# Altium PCB PCB1.PcbDoc
Units mil, origin at the board's own origin, x right, y up, seen from the top; angles counter-clockwise.
Board outline 6496.06 x 3740.16 mil, 2 copper layers (Top Layer, Bottom Layer); 28 components, 22 nets, 182 pads, 0 vias.
Unrouted connection lines stored in the file: 46.
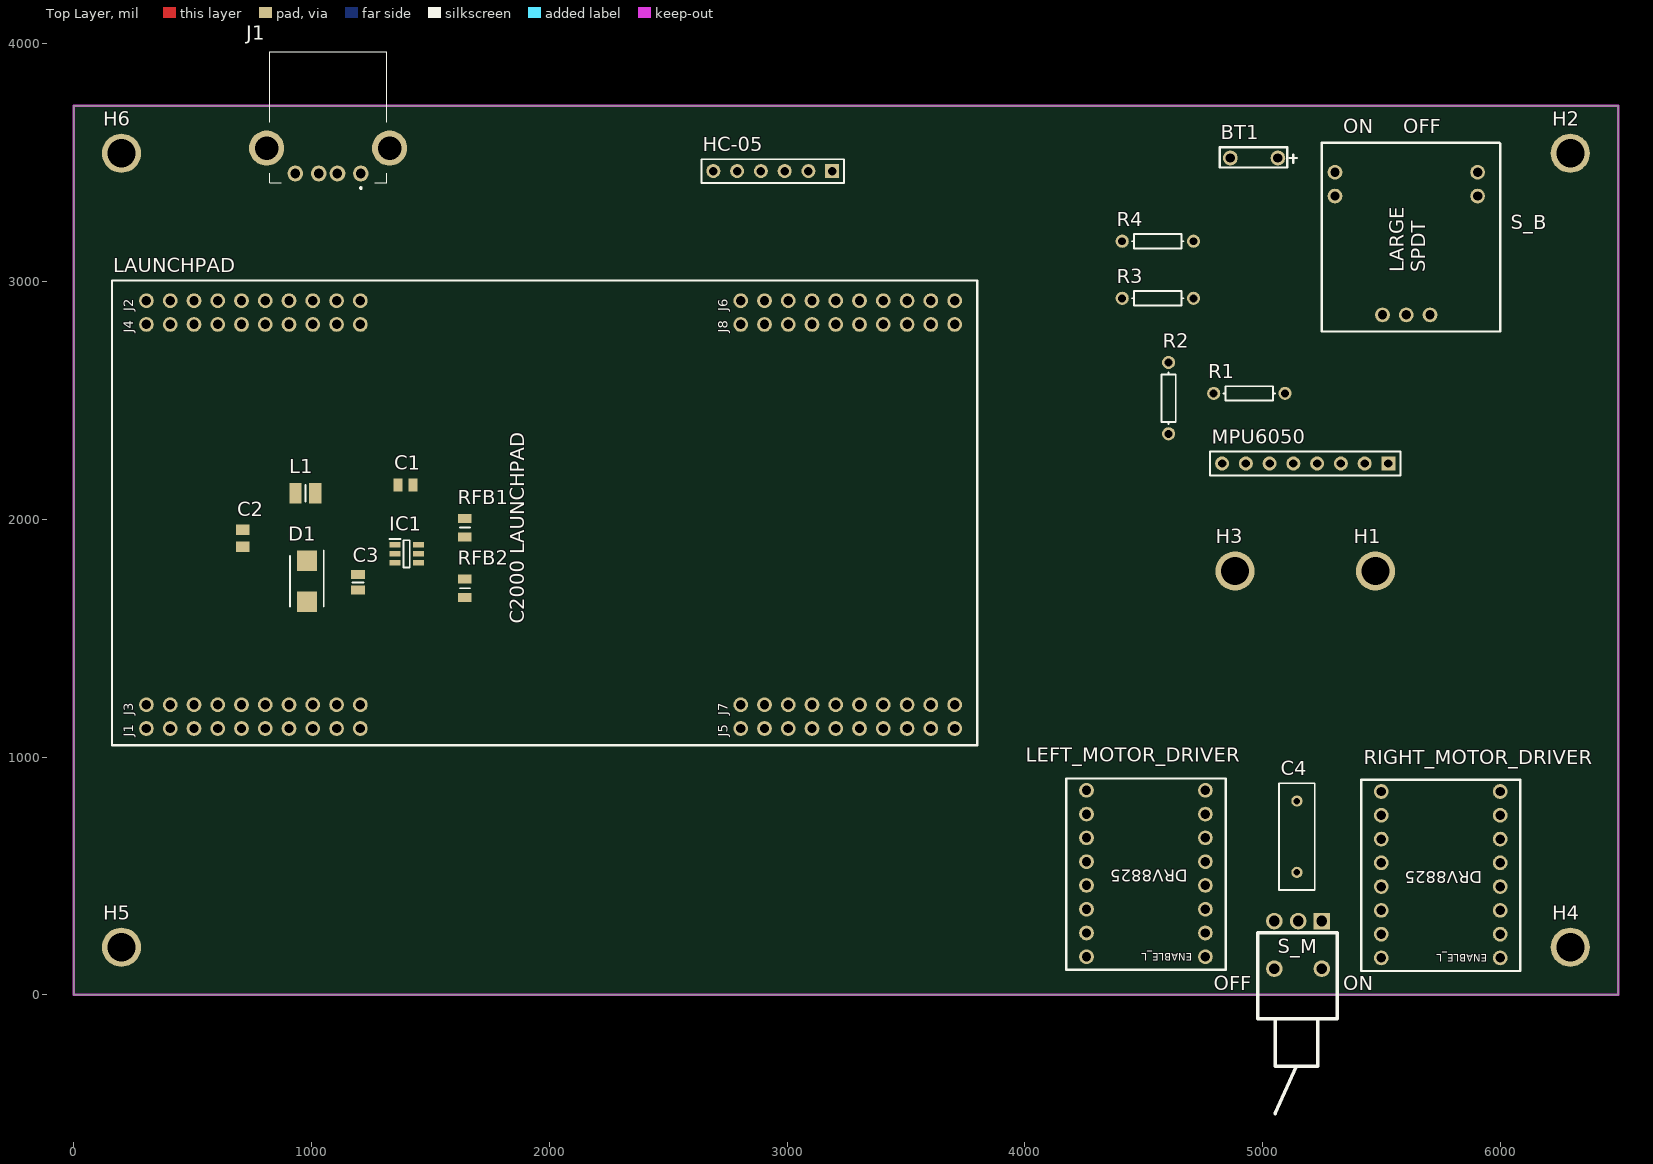
[diagram p0: Top Layer view]
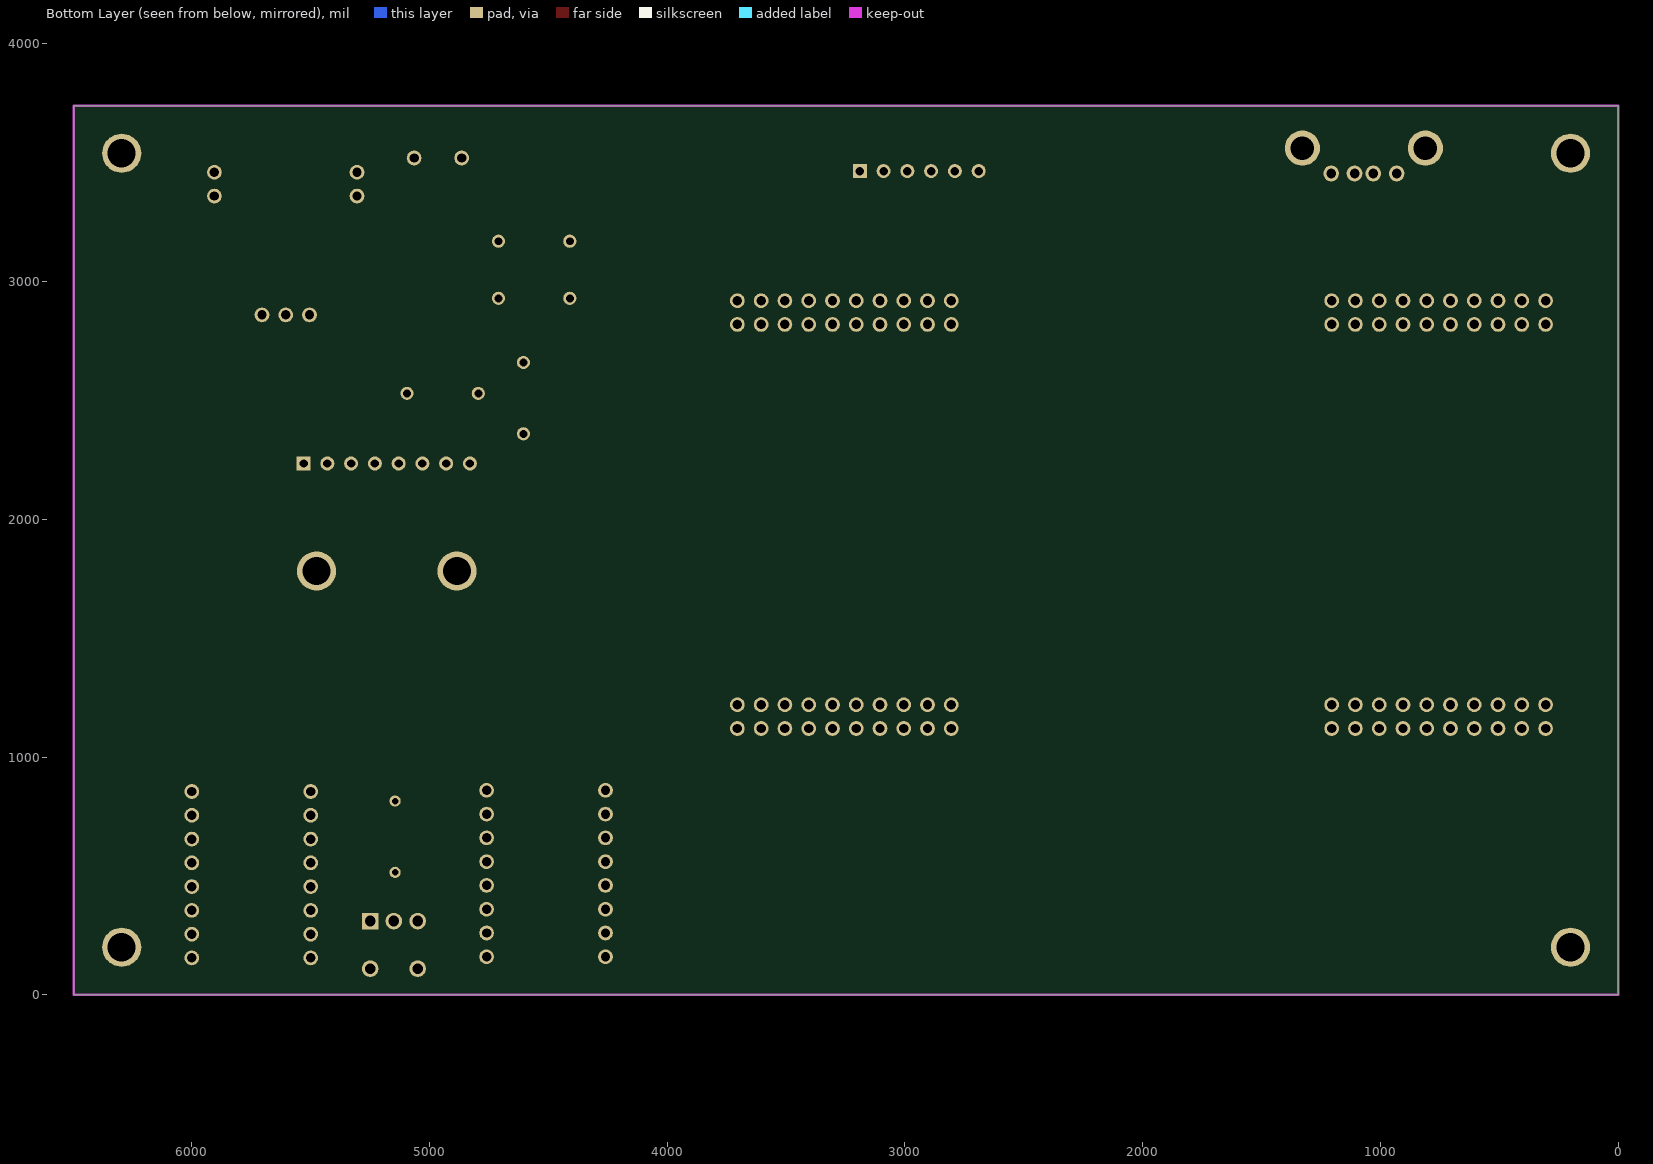
[diagram p1: Bottom Layer view, seen from below]

## Layer stack, top to bottom
Top Solder: solder mask 0.4, Solder Resist, Dk 3.5
Top Layer: signal copper 1.4
Dielectric 1: dielectric 12.6, FR-4, Dk 4.8
Bottom Layer: signal copper 1.4
Bottom Solder: solder mask 0.4, Solder Resist, Dk 3.5

## Board outline
0,0 6496.06,0 6496.06,3740.16 0,3740.16

## Design rules (kind name [scope] priority, off if disabled: settings)
Clearance [All] p1: gap=10 ignorepadtopadclearanceinfootprint=FALSE except(0: Arc-Hole Track-Hole SMDPad-Hole THPad-Hole Via-Hole Fill-Hole Poly-Hole Region-Hole Text-Hole)
PolygonConnect [All] p1: connectstyle=Relief reliefconductorwidth=10 reliefentries=4 polygonreliefangle="90 Angle" airgapwidth=10
RoutingVias [All] p1: holewidth=28 width=50 viastyle="Through Hole" minholewidth=28 minwidth=50 maxholewidth=28 maxwidth=50
SolderMaskExpansion [All] p1: expansion=4 istentingtop=FALSE
Width [All] p1: maxlimit=20 minlimit=20 preferedwidth=20
30 further rules are at their usual default settings.

## Components (designator, comment, footprint, x,y, rotation, side; value= is the part's Value field where it differs from the comment)
BT1 "Battery" BATT_FP 5065,3520 r180 top
C1 "22nF" CAPC2012X135N 1395,2145 r0 top
C2 "22uF" CAPC2012X140N 710,1921 r90 top
C3 "10uF" CAPC2114X145N 1195,1735 r90 top
C4 "Cap" RAD-0.3 5145,665 r90 top value=47uF
D1 "SSB44-E3_52T" DIOM5436X244N 980,1740 r270 top
H1 "Hole 3mm" "Hole 3mm"#1 5470,1675 r0 top
H2 "Hole 3mm" "Hole 3mm"#2 6295,3540 r0 top
H3 "Hole 3mm" "Hole 3mm"#3 4880,1782.24 r0 top
H4 "Hole 3mm" "Hole 3mm"#2 6295,200 r0 top
H5 "Hole 3mm" "Hole 3mm"#2 200,200 r0 top
H6 "Hole 3mm" "Hole 3mm"#2 200,3540 r0 top
HC-05 "Header 6" HDR1X6 3190,3465 r180 top
IC1 "ACT4088US-T" SOT95P280X145-6N 1400,1855 r0 top
J1 "SS-52100-001" SS52100001 1207.17,3455 r180 top
L1 "4.7uH" INDC2520X120N 973.66,2110 r0 top
LAUNCHPAD "LAUNCHXL_F28379D" LAUNCH_PAD 305,1120 r90 top
LEFT_MOTOR_DRIVER "DRV8825" DRV8825_FP 4760,160 r180 top
MPU6050 "Header 8" HDR1X8 5530,2235 r180 top
R1 "Res1" AXIAL-0.3 4945,2530 r0 top value=1K
R2 "Res1" AXIAL-0.3 4605,2510 r270 top value=1K
R3 "Res1" AXIAL-0.3 4560,2930 r0 top value=1K
R4 "Res1" AXIAL-0.3 4560,3170 r180 top value=1K
RFB1 "49.9K" RESC2012X50N 1645,1965 r90 top
RFB2 "9.53K" RESC2012X50N 1645,1710 r90 top
RIGHT_MOTOR_DRIVER "DRV8825" DRV8825_FP 6000,155 r180 top
S_B "SW-SPDT" SPDT_LARGE 5505,2860 r90 top
S_M "SW-SPDT" "SW DPST jameco" 5152.36,311.89 r0 top

## Footprints (in the part's own frame and the unit in brackets; to place one, negate y for a bottom-side part, rotate by r counter-clockwise, add the part's x,y. Pads: shape width x height; smd on the part's side, far side on the other; paste and mask are expansions set on the pad)
AXIAL-0.3 [mm] "Axial Device, Thru-Hole; 2 Leads; 0.3 in Pin Spacing"
  round 1.4 hole 0.85: 1(-3.81,0) 2(3.81,0)
  silkscreen extent -2.77,-0.76 2.77,0.76
BATT_FP [mil]
  round 62 hole 39.4: 1(0,0) 2(200,0)
  silkscreen extent -80,-45 245,40
CAPC2012X135N [mm]
  rect 0.96x1.39 smd: 1(-0.81,0) 2(0.81,0)
  body extent -1,-0.63 1,0.63, height 1.35
CAPC2012X140N [mil]
  rect 44x57 smd: 1(-36,0) 2(36,0)
CAPC2114X145N [mm]
  rect 0.96x1.49 smd: 1(-0.84,0) 2(0.84,0)
  silkscreen extent 0,-0.58 0,0.58, body extent -1.05,-0.67 1.05,0.67, height 1.45
DIOM5436X244N [mm]
  rect 2.2x2.15 smd: 1(-2.2,0) 2(2.2,0)
  silkscreen extent -3.28,-1.81 2.7,1.81, body extent -2.7,-1.81 2.7,1.81, height 2.44
DRV8825_FP [mil]
  round 62 hole 39.4: 1(0,0) 2(0,-100) 3(0,-200) 4(0,-300) 5(0,-400) 6(0,-500) 7(0,-600) 8(0,-700) 9(500,0) 10(500,-100) 11(500,-200) 12(500,-300) 13(500,-400) 14(500,-500) 15(500,-600) 16(500,-700)
  silkscreen extent -85,-750 585,55
HDR1X6 [mm] "Connector; Header; 6 Position"
  rect 1.5x1.5 hole 0.9: 1(0,0)
  round 1.5 hole 0.9: 2(2.54,0) 3(5.08,0) 4(7.62,0) 5(10.16,0) 6(12.7,0)
  silkscreen extent -1.27,-1.27 13.97,1.27
HDR1X8 [mm] "Connector; Header; 8 Position"
  rect 1.5x1.5 hole 0.9: 1(0,0)
  round 1.5 hole 0.9: 2(2.54,0) 3(5.08,0) 4(7.62,0) 5(10.16,0) 6(12.7,0) 7(15.24,0) 8(17.78,0)
  silkscreen extent -1.27,-1.27 19.05,1.27
"Hole 3mm"#1 [mil]
  round 165 hole 118.11: 1(5.28,107.24)
"Hole 3mm"#2 [mil]
  round 165 hole 118.11: 1(0,0)
"Hole 3mm"#3 [mil]
  round 165 hole 118.11: 1(4.72,0)
INDC2520X120N [mm]
  rect 1.3x2.2 smd: 1(-1.05,0) 2(1.05,0)
  silkscreen extent 0,-0.9 0,0.9, body extent -1.25,-1 1.25,1, height 1.2
LAUNCH_PAD [mil]
  round 62 hole 39.4: 1(0,0) 2(0,-100) 3(0,-200) 4(0,-300) 5(0,-400) 6(0,-500) 7(0,-600) 8(0,-700) 9(0,-800) 10(0,-900) 11(1800,-900) 12(1800,-800) 13(1800,-700) 14(1800,-600) 15(1800,-500) 16(1800,-400) 17(1800,-300) 18(1800,-200) 19(1800,-100) 20(1800,0) 21(100,0) 22(100,-100) 23(100,-200) 24(100,-300) 25(100,-400) 26(100,-500) 27(100,-600) 28(100,-700) 29(100,-800) 30(100,-900) 31(1700,-900) 32(1700,-800) 33(1700,-700) 34(1700,-600) 35(1700,-500) 36(1700,-400) 37(1700,-300) 38(1700,-200) 39(1700,-100) 40(1700,0) 41(0,-2500) 42(0,-2600) 43(0,-2700) 44(0,-2800) 45(0,-2900) 46(0,-3000) 47(0,-3100) 48(0,-3200) 49(0,-3300) 50(0,-3400) 51(1800,-3400) 52(1800,-3300) 53(1800,-3200) 54(1800,-3100) 55(1800,-3000) 56(1800,-2900) 57(1800,-2800) 58(1800,-2700) 59(1800,-2600) 60(1800,-2500) 61(100,-2500) 62(100,-2600) 63(100,-2700) 64(100,-2800) 65(100,-2900) 66(100,-3000) 67(100,-3100) 68(100,-3200) 69(100,-3300) 70(100,-3400) 71(1700,-3400) 72(1700,-3300) 73(1700,-3200) 74(1700,-3100) 75(1700,-3000) 76(1700,-2900) 77(1700,-2800) 78(1700,-2700) 79(1700,-2600) 80(1700,-2500)
  silkscreen extent -70,-3495 1885,145
RAD-0.3 [mm] "Radial Cap, Thru-Hole; 2 Leads; 0.3 in Pin Spacing"
  round 1.2 hole 0.7: 1(-3.81,0) 2(3.81,0)
  silkscreen extent -5.71,-1.91 5.71,1.91
RESC2012X50N [mm]
  rect 0.95x1.45 smd: 1(-1,0) 2(1,0)
  silkscreen extent 0,-0.53 0,0.53, body extent -1.02,-0.63 1.02,0.63, height 0.5
SOT95P280X145-6N [mm]
  rect 1.15x0.6 smd: 1(-1.25,0.95) 2(-1.25,0) 3(-1.25,-0.95) 4(1.25,-0.95) 5(1.25,0) 6(1.25,0.95)
  silkscreen extent -1.82,-1.45 0.33,1.6, body extent -1.4,-1.45 1.4,1.45, height 1.45
SPDT_LARGE [mil]
  round 62 hole 39.4: 1(0,0) 2(0,-100) 3(0,-200) 4(500,200) 5(600,200) 6(500,-400) 7(600,-400)
  silkscreen extent -70,-495 725,255
SS52100001 [mm]
  round 1.68 hole 1.02: 1(0,0) 2(2.5,0) 3(4.5,0) 4(7,0)
  round 3.75 hole 2.5: MH1(-3.07,-2.71) MH2(10.07,-2.71)
  silkscreen extent -2.75,-12.99 9.75,1.66, body extent -4.21,-12.99 11.22,1.01, height 8
"SW DPST jameco" [mil]
  rect 70x70 hole 45: 1(97.64,-1.89)
  round 70 hole 45: 2(-2.36,-1.89) 3(-102.36,-1.89) 4(-102.36,-201.89) 5(97.64,-201.89)
  silkscreen extent -172,-812 162,-52

## Part data
BT1: "Multicell Battery", LatestRevisionDate=17-Jul-2002, LatestRevisionNote="Re-released for DXP Platform.", PackageDescription="Battery; 2 Leads", PackageReference=BAT-2, Published=24-Mar-1999, Publisher="Altium Limited"
C1: library part VJ0805Y223JXAPW1BC, "Capacitor", Manufacturer_Name=Vishay, Datasheet Link=https://componentsearchengine.com/Datasheets/1/VJ0805Y223JXAPW1BC.pdf, Height=1.35mm, Manufacturer_Part_Number=VJ0805Y223JXAPW1BC
C2: library part 08056D226MAT2A, "Capacitor", Manufacturer_Name=AVX, Datasheet Link=http://componentsearchengine.com/Datasheets/3/08056D226MAT2A.pdf, Manufacturer_Part_Number=08056D226MAT2A
C3: library part TMK212BC6106KG-T, "Capacitor", Manufacturer_Name="TAIYO YUDEN", Datasheet Link=https://ds.yuden.co.jp/TYCOMPAS/ut/download?pn=LMK063BBJ474MPLF&fileType=CA, Height=1.45mm, Manufacturer_Part_Number=TMK212BC6106KG-T
C4: "Capacitor", LatestRevisionDate=17-Jul-2002, LatestRevisionNote="Re-released for DXP Platform.", PackageDescription="Radial Cap, Thru-Hole; 2 Leads; 0.3 in Pin Spacing", PackageReference=RAD-0.3, Published=8-Jun-2000, Publisher="Altium Limited"
D1: "Schottky Diode", Manufacturer_Name=Vishay, Manufacturer_Part_Number=SSB44-E3/52T, Mouser2 Part Number=625-SSB44-E3, Datasheet Link=https://componentsearchengine.com//SSB44-E3_52T.pdf, Height=2.44mm, Mouser2 Price/Stock=https://www.mouser.com/Search/Refine.aspx?Keyword=625-SSB44-E3
HC-05: "Header, 6-Pin", LatestRevisionDate=17-Jul-2002, LatestRevisionNote="Re-released for DXP Platform.", Publisher="Altium Limited"
IC1: "Integrated Circuit", Manufacturer_Name=Qorvo, Mouser Part Number=107-ACT4088US-T, Datasheet Link=https://active-semi.com/wp-content/uploads/ACT4088_Datasheet.pdf, Height=1.45mm, Manufacturer_Part_Number=ACT4088US-T, Mouser Price/Stock=https://www.mouser.co.uk/ProductDetail/Qorvo/ACT4088US-T?qs=QQJxVsr8EGZznLQLhk8tEQ%3D%3D
J1: "Connector", Manufacturer_Name=Bel, Height=7.9mm, Manufacturer_Part_Number=SS-52100-001
L1: library part TFM252012ALVA4R7MTAA, "Inductor", Manufacturer_Name=TDK, Datasheet Link=https://www.mouser.hk/datasheet/2/400/TDK_02062019_TFM-ALVA_datasheet-1530462.pdf, Height=1.2mm, Manufacturer_Part_Number=TFM252012ALVA4R7MTAA
MPU6050: "Header, 8-Pin", LatestRevisionDate=17-Jul-2002, LatestRevisionNote="Re-released for DXP Platform.", Publisher="Altium Limited"
R1 R2 R3 R4: "Resistor", LatestRevisionDate=17-Jul-2002, LatestRevisionNote="Re-released for DXP Platform.", PackageDescription="Axial Device, Thru-Hole; 2 Leads; 0.3 in Pin Spacing", PackageReference=AXIAL-0.3, Published=8-Jun-2000, Publisher="Altium Limited"
RFB1: library part CRCW080549K9FKEA, "Resistor", Manufacturer_Name=Vishay, Datasheet Link=http://www.vishay.com/docs/20035/dcrcwe3.pdf, Height=0.5mm, Manufacturer_Part_Number=CRCW080549K9FKEA
RFB2: library part CRCW08059K53FKEA, "Resistor", Manufacturer_Name=Vishay, Mouser2 Part Number=71-CRCW0805-9.53K-E3, Datasheet Link=https://componentsearchengine.com//CRCW08059K53FKEA.pdf, Height=0.5mm, Manufacturer_Part_Number=CRCW08059K53FKEA, Mouser2 Price/Stock=https://www.mouser.com/Search/Refine.aspx?Keyword=71-CRCW0805-9.53K-E3
S_B S_M: "SPDT Subminiature Toggle Switch, Right Angle Mounting, Vertical Actuation", ComponentLink1Description="Manufacturer Link", ComponentLink1URL=http://www.apem.com, DatasheetVersion=05-Dec-2000, LatestRevisionDate=17-Dec-2003, LatestRevisionNote="Schematic revised, PCB Footprint replaced.", PackageDescription="Switch; 4 Leads", PackageReference=TL36WW15050, Published=24-Mar-1999, Publisher="Altium Limited"

## Nets (pads, with @x,y where several pads share a name; then routed paths per layer and width w, separated by ;. In a path a pad name is that pad's centre, name@x,y a point inside that pad or via, vN(x,y) a via of type N, cw(c..) or ccw(c..) an arc to the next point about the centre after c; other vN are vias at no path point)
3V3: HC-05.2 LAUNCHPAD.1 LAUNCHPAD.41 MPU6050.1 R1.2 R2.1
5V: LAUNCHPAD.21 LAUNCHPAD.61 LEFT_MOTOR_DRIVER.2 LEFT_MOTOR_DRIVER.3 LEFT_MOTOR_DRIVER.10 RIGHT_MOTOR_DRIVER.2 RIGHT_MOTOR_DRIVER.3 RIGHT_MOTOR_DRIVER.10 S_M.1
5V_USB: C2.2 J1.1 L1.1 RFB1.2
12V: C3.2 C4.2 IC1.2 LEFT_MOTOR_DRIVER.16 R3.2 RIGHT_MOTOR_DRIVER.16 S_B.3
BATT_LEVEL: LAUNCHPAD.70 R3.1 R4.2
GND: BT1.2 C2.1 C3.1 C4.1 D1.2 HC-05.3 IC1.5 J1.4 LAUNCHPAD.20 LAUNCHPAD.22 LAUNCHPAD.60 LAUNCHPAD.62 LEFT_MOTOR_DRIVER.9 LEFT_MOTOR_DRIVER.15 MPU6050.2 R4.1 RFB2.1 RIGHT_MOTOR_DRIVER.9 RIGHT_MOTOR_DRIVER.15
I2C_SCL: LAUNCHPAD.10 MPU6050.3 R1.1
I2C_SDA: LAUNCHPAD.9 MPU6050.4 R2.2
LEFT_DIR: LAUNCHPAD.42 LEFT_MOTOR_DRIVER.8
LEFT_STEP: LAUNCHPAD.43 LEFT_MOTOR_DRIVER.7
MOTOR_ENABLE: LAUNCHPAD.46 S_M.3
NetBT1_1: BT1.1 S_B.2
NetC1_1: C1.1 D1.1 IC1.1 L1.2
NetC1_2: C1.2 IC1.6
NetIC1_4: IC1.4 RFB1.1 RFB2.2
NetLEFT_MOTOR_DRIVER_1: LEFT_MOTOR_DRIVER.1 RIGHT_MOTOR_DRIVER.1 S_M.2
NetLEFT_MOTOR_DRIVER_5: LEFT_MOTOR_DRIVER.5 LEFT_MOTOR_DRIVER.6
NetRIGHT_MOTOR_DRIVER_5: RIGHT_MOTOR_DRIVER.5 RIGHT_MOTOR_DRIVER.6
RIGHT_DIR: LAUNCHPAD.48 RIGHT_MOTOR_DRIVER.8
RIGHT_STEP: LAUNCHPAD.45 RIGHT_MOTOR_DRIVER.7
SCIRXDA: HC-05.4 LAUNCHPAD.77
SCITXDA: HC-05.5 LAUNCHPAD.78
pads on no net: H1.1 H2.1 H3.1 H4.1 H5.1 H6.1 HC-05.1 HC-05.6 IC1.3 J1.2 J1.3 J1.MH1 J1.MH2 LAUNCHPAD.2 LAUNCHPAD.3 LAUNCHPAD.4 LAUNCHPAD.5 LAUNCHPAD.6 LAUNCHPAD.7 LAUNCHPAD.8 LAUNCHPAD.11 LAUNCHPAD.12 LAUNCHPAD.13 LAUNCHPAD.14 LAUNCHPAD.15 LAUNCHPAD.16 LAUNCHPAD.17 LAUNCHPAD.18 LAUNCHPAD.19 LAUNCHPAD.23 LAUNCHPAD.24 LAUNCHPAD.25 LAUNCHPAD.26 LAUNCHPAD.27 LAUNCHPAD.28 LAUNCHPAD.29 LAUNCHPAD.30 LAUNCHPAD.31 LAUNCHPAD.32 LAUNCHPAD.33 LAUNCHPAD.34 LAUNCHPAD.35 LAUNCHPAD.36 LAUNCHPAD.37 LAUNCHPAD.38 LAUNCHPAD.39 LAUNCHPAD.40 LAUNCHPAD.44 LAUNCHPAD.47 LAUNCHPAD.49 LAUNCHPAD.50 LAUNCHPAD.51 LAUNCHPAD.52 LAUNCHPAD.53 LAUNCHPAD.54 LAUNCHPAD.55 LAUNCHPAD.56 LAUNCHPAD.57 LAUNCHPAD.58 LAUNCHPAD.59 LAUNCHPAD.63 LAUNCHPAD.64 LAUNCHPAD.65 LAUNCHPAD.66 LAUNCHPAD.67 LAUNCHPAD.68 LAUNCHPAD.69 LAUNCHPAD.71 LAUNCHPAD.72 LAUNCHPAD.73 LAUNCHPAD.74 LAUNCHPAD.75 LAUNCHPAD.76 LAUNCHPAD.79 LAUNCHPAD.80 LEFT_MOTOR_DRIVER.4 LEFT_MOTOR_DRIVER.11 LEFT_MOTOR_DRIVER.12 LEFT_MOTOR_DRIVER.13 LEFT_MOTOR_DRIVER.14 MPU6050.5 MPU6050.6 MPU6050.7 MPU6050.8 RIGHT_MOTOR_DRIVER.4 RIGHT_MOTOR_DRIVER.11 RIGHT_MOTOR_DRIVER.12 RIGHT_MOTOR_DRIVER.13 RIGHT_MOTOR_DRIVER.14 S_B.1 S_B.4 S_B.5 S_B.6 S_B.7 S_M.4 S_M.5

## Polygon pours and split planes (outlines as drawn)
GND on Bottom Layer "NONET_L02_P004" (hatched 45Degree grid 20 track 8, shelved, pour order 4): 0,0 0,3740.16 6496.06,3740.16 6496.06,0
GND on Bottom Layer "NONET_L02_P002" (hatched 45Degree grid 20 track 8, shelved, pour order 2): 0,0
GND on Bottom Layer "NONET_L02_P001" (hatched 45Degree grid 20 track 8, shelved, pour order 1): 6496,0
12V on Top Layer "NONET_L01_P005" (hatched 45Degree grid 20 track 8, shelved, pour order 5): 0,0 0,3740.16 6496.06,3740.16 6496.06,0

## Keep-outs
Keep-Out Layer:
  the board outline again, w10

## Silkscreen, mask and mechanical layers (free items; w line width, h text height)
Top Overlay:
  text "ON     OFF" at 5340,3625 h60
  text "OFF" at 4795,20 h60
  text "ON" at 5340,20 h60

## Text inside footprints (layer, text, board x,y; h text height)
LAUNCHPAD: Top Overlay "J3" at 250,1175 h40 r90; Top Overlay "J8" at 2750,2785 h40 r90; Top Overlay "J4" at 250,2785 h40 r90; Top Overlay "J2" at 250,2875 h40 r90; Top Overlay "J7" at 2750,1175 h40 r90; Top Overlay "J5" at 2750,1085 h40 r90; Top Overlay "J1" at 250,1085 h40 r90; Top Overlay "J6" at 2750,2875 h40 r90; Top Overlay "C2000 LAUNCHPAD" at 1895,1560 h60 r90
LEFT_MOTOR_DRIVER: Top Overlay "ENABLE_L" at 4705,175 h30 r180
RIGHT_MOTOR_DRIVER: Top Overlay "ENABLE_L" at 5945,170 h30 r180
S_B: Top Overlay "LARGE / SPDT" at 5685,3040.05 h60 r90